# Altium PCB ICSP-PROG-PIN-1.5-2.54.PcbDoc
Units mm, origin at the board's own origin, x right, y up, seen from the top; angles counter-clockwise.
Board outline 20 x 34 mm, 2 copper layers (TOP, BOT), stack 0.325 mm thick; 3 components, 6 nets, 27 pads, 32 vias.
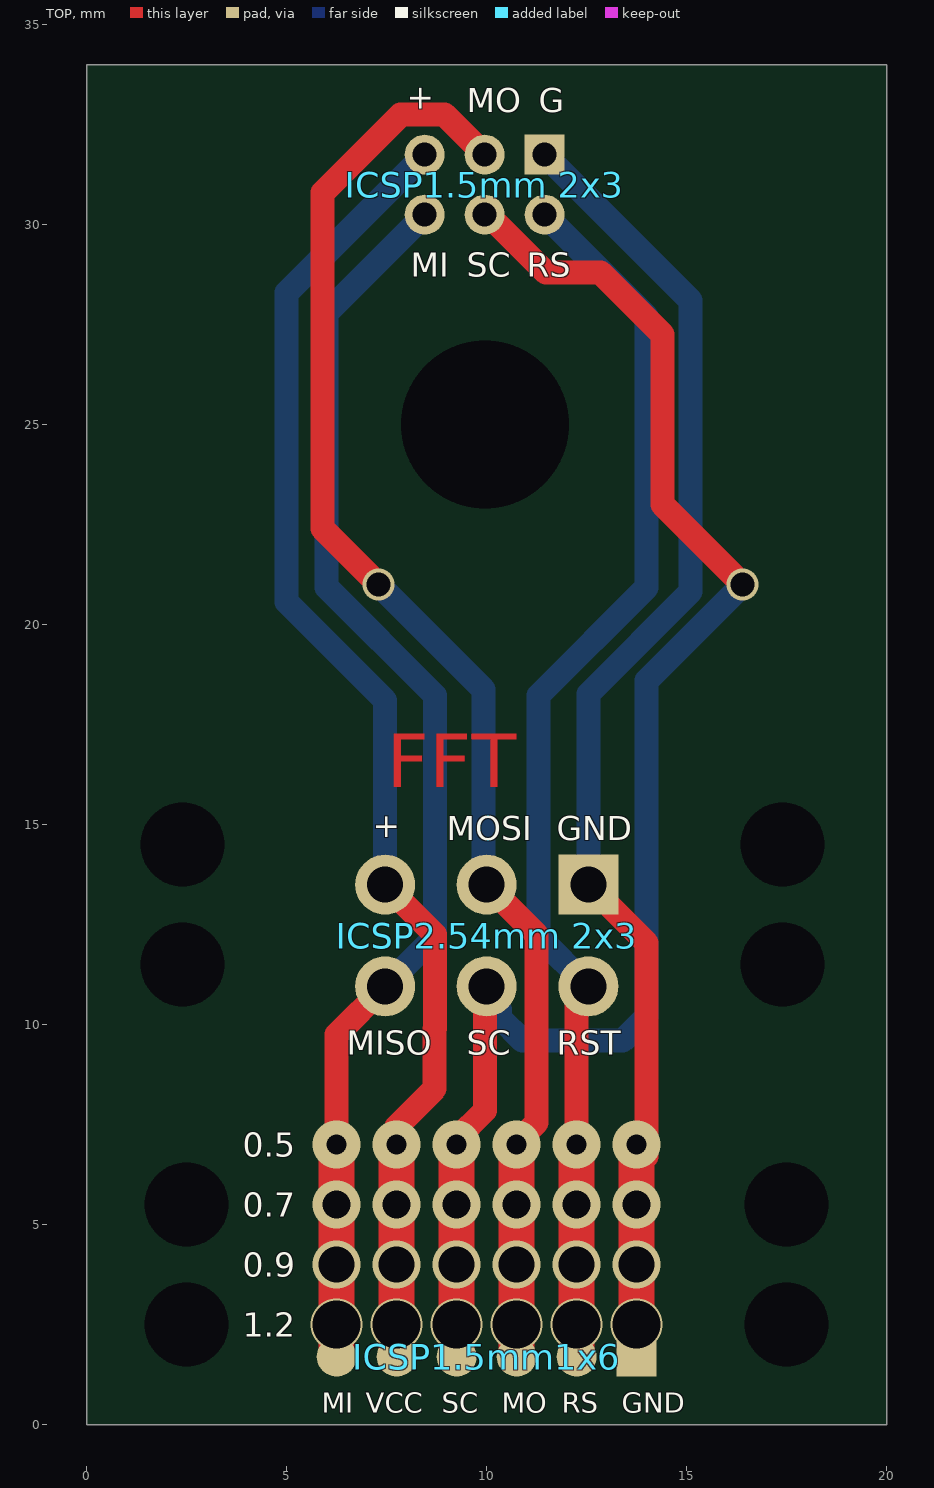
[diagram p0: TOP view]
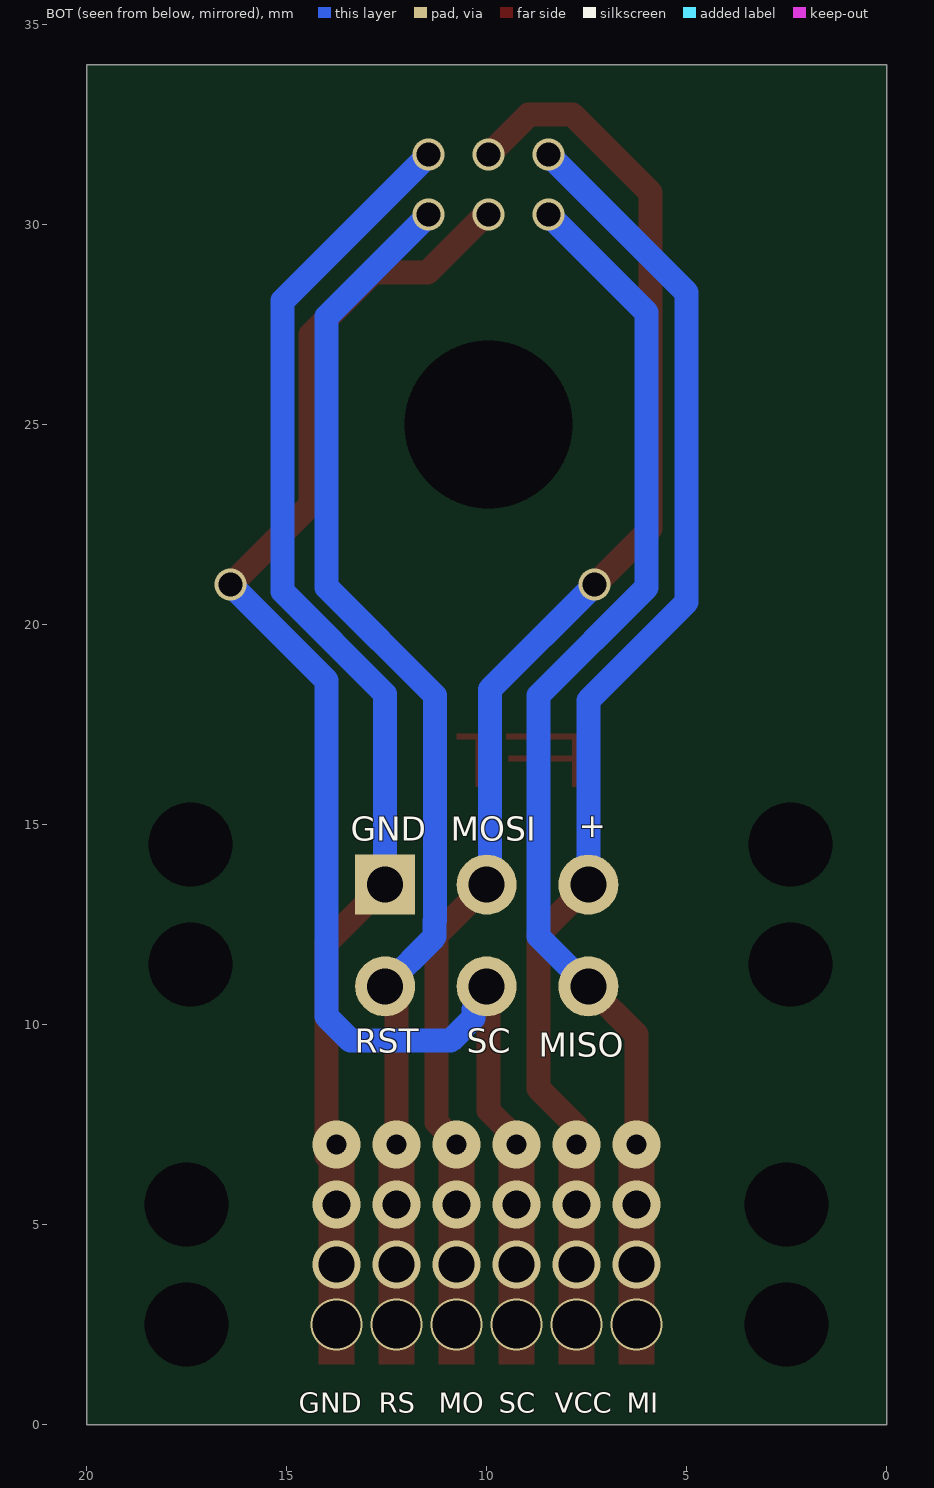
[diagram p1: BOT view, seen from below]

## Layer stack, top to bottom
Top Solder: solder mask 0.0102, Solder Resist, Dk 3.5
TOP: signal copper 0.0356
Dielectric 1: core 0.254, FR-4, Dk 4.2
BOT: signal copper 0.0356
Solder Side: solder mask 0.0102, Solder Resist, Dk 3.5

## Board outline
0,0 0,34 20,34 20,0

## Design rules (kind name [scope] priority, off if disabled: settings)
Clearance Clearance_GND_GND [InNet('GND') vs InNet('GND')] p1: gap=0 ignorepadtopadclearanceinfootprint=FALSE
Clearance [All] p2: gap=0.2 ignorepadtopadclearanceinfootprint=FALSE except(0: Arc-Region Arc-Hole Track-Region Track-Hole SMDPad-Region SMDPad-Hole THPad-Region THPad-Hole Via-Region Via-Hole Fill-Region Fill-Hole Poly-Region Poly-Hole Region-Region Region-Hole Text-Hole)
ComponentClearance [All] p1: gap=0.01 collisioncheckmode=3 verticalgap=0.254 showdistances=FALSE
HoleSize [All] p1: absolutevalues=TRUE maxlimit=10 minlimit=0.025 maxpercent=80.000 minpercent=20.000
MinimumSolderMaskSliver [All] p1 off: minsoldermaskwidth=0.1
PlaneClearance [All] p1: clearance=0
PolygonConnect PolygonConnect_via [isvia] p1: connectstyle=Direct reliefconductorwidth=0.254 reliefentries=4 polygonreliefangle="45 Angle" airgapwidth=0.15
PolygonConnect [All] p2: connectstyle=Relief reliefconductorwidth=0.254 reliefentries=4 polygonreliefangle="90 Angle" airgapwidth=0.1
RoomDefinition ICSP-PROG-PIN-1.5-2.54 [InComponentClass('ICSP-PROG-PIN-1.5-2.54')] p1: confinementstyle=ConfineOut formatcopy=TRUE lockcomponents=FALSE outline -287.018,-175.424 -236.218,-175.424 -236.218,-150.024 -287.018,-150.024
RoutingVias [All] p1: holewidth=0.6 width=0.9 viastyle="Through Hole" minholewidth=0.3 minwidth=0.5 maxholewidth=0.9 maxwidth=1.2
SilkToSilkClearance [All] p1 off: silktosilkclearance=0.1
SilkToSolderMaskClearance SilkscreenOverComponentPads [IsPad] p1 off: minsilkscreentomaskgap=0.1 clearancetoexposedcopper=TRUE
SolderMaskExpansion [All] p1: expansion=0.102 istentingtop=FALSE
Width [All] p1: maxlimit=10 minlimit=0.15 preferedwidth=0.3
24 further rules are at their usual default settings.

## Components (designator, comment, footprint, x,y, rotation, side; value= is the part's Value field where it differs from the comment)
ICSP1.5mm1x6 "ICSP pad" "ICSP prg PAD 1.5mm 1Line" 10,1.7 r0 top
"ICSP1.5mm 2x3" "ICSP pad" "ICSP prg PAD 1.5mm" 9.95,31 r90 top
"ICSP2.54mm 2x3" "ICSP pad" "ICSP prg PIN 2.54mm" 10,12.23 r90 top

## Footprints (in the part's own frame and the unit in brackets; to place one, negate y for a bottom-side part, rotate by r counter-clockwise, add the part's x,y. Pads: shape width x height; smd on the part's side, far side on the other; paste and mask are expansions set on the pad)
"ICSP prg PAD 1.5mm" [mm] "pads only"
  round 1 smd: 1(-0.75,1.5) 2(0.75,1.5) 3(-0.75,0) 4(0.75,0) 5(-0.75,-1.5)
  rect 1x1 smd: 6(0.75,-1.5)
"ICSP prg PAD 1.5mm 1Line" [mm] "pads only"
  round 1 smd: 1(-3.75,0) 2(-2.25,0) 3(-0.75,0) 4(0.75,0) 5(2.25,0)
  rect 1x1 smd: 6(3.75,0)
"ICSP prg PIN 2.54mm" [mm] "pads only"
  round 1.5 hole 0.9: 1(-1.27,2.54) 2(1.27,2.54) 3(-1.27,0) 4(1.27,0) 5(-1.27,-2.54)
  rect 1.5x1.5 hole 0.9: 6(1.27,-2.54)

## Part data
ICSP1.5mm1x6 "ICSP1.5mm 2x3" "ICSP2.54mm 2x3": library part "Progr ICSP", "PAD prog"

## Free pads (board coordinates)
  round 1.6 hole 2.1 unplated: 6(2.4,11.5) 6(2.4,14.5) 6(2.5,2.5) 6(2.5,5.5) 6(17.4,11.5) 6(17.4,14.5) 6(17.5,2.5) 6(17.5,5.5)
  round 1.6 hole 4.2 unplated: 6(9.96,25)

## Via types
v1: diameter 0.8, hole 0.6, TOP to BOT, tented both sides, 8 vias
v2: diameter 1.2, hole 0.9, TOP to BOT, 6 vias
v3: diameter 1.2, hole 0.7, TOP to BOT, 6 vias
v4: diameter 1.2, hole 0.5, TOP to BOT, 6 vias
v5: diameter 1.3, hole 1.2, TOP to BOT, 6 vias

## Nets (pads, with @x,y where several pads share a name; then routed paths per layer and width w, separated by ;. In a path a pad name is that pad's centre, name@x,y a point inside that pad or via, vN(x,y) a via of type N, cw(c..) or ccw(c..) an arc to the next point about the centre after c; other vN are vias at no path point)
GND: "ICSP1.5mm 2x3.6" "ICSP2.54mm 2x3.6" ICSP1.5mm1x6.6 | length 28.3
  TOP w0.6: 12.54,13.5 14,12.04 v4@14,6.7 ; v4(13.75,7) v4@13.79,7.04
  BOT w0.6: v1(11.45,31.75) 15.1,28.1 15.1,20.831 12.54,18.271 12.54,13.5
  other v2: 13.75,4
  other v3: 13.75,5.5
  other v5: 13.75,2.5
MOSI: "ICSP1.5mm 2x3.4" "ICSP2.54mm 2x3.4" ICSP1.5mm1x6.4 | length 34
  TOP w0.6: v1(7.3,21) 5.9,22.4 5.9,30.8 7.85,32.75 8.95,32.75 v1(9.95,31.75) ; 10,13.5 11.25,12.25 11.25,7.556 10.75,7.056 v4(10.75,7) v3(10.75,5.5) v2@10.75,4.5
  BOT w0.6: v1(7.3,21) 9.913,18.387 9.913,13.587 10,13.5
  other v2: 10.75,4
  other v5: 10.75,2.5
MSIO: "ICSP1.5mm 2x3.1" "ICSP2.54mm 2x3.1" ICSP1.5mm1x6.1 | length 29.9
  TOP w0.6: v2@6.25,4.5 v2(6.25,4) 6.25,4.7 v3(6.25,5.5) 6.25,9.75 7.46,10.96
  BOT w0.6: 7.46,10.96 8.71,12.21 8.71,18.227 6,20.937 6,27.8 v1(8.45,30.25)
  other v4: 6.25,7
  other v5: 6.25,2.5
RESET: "ICSP1.5mm 2x3.5" "ICSP2.54mm 2x3.5" ICSP1.5mm1x6.5 | length 28.6
  TOP w0.6: v2@12.25,4.5 12.25,10.67 12.54,10.96
  BOT w0.6: v1(11.45,30.25) 14,27.7 14,20.937 11.29,18.227 11.29,12.6 11.3,12.59 11.3,12.2 12.54,10.96
  other v2: 12.25,4
  other v3: 12.25,5.5
  other v4: 12.25,7
  other v5: 12.25,2.5
SCK: "ICSP1.5mm 2x3.3" "ICSP2.54mm 2x3.3" ICSP1.5mm1x6.3 | length 36.6
  TOP w0.6: v2@9.25,4.5 9.25,7.15 9.96,7.86 9.96,10.96 ; 9.828,11.132 10,10.96 ; v1(9.95,30.25) 10.036,30.25 11.486,28.8 12.85,28.8 14.4,27.25 14.4,23 v1(16.4,21)
  BOT w0.6: 10,10.96 10,10.716 10.337,10.38 10.337,10.163 10.9,9.6 13.4,9.6 14,10.2 14,18.6 v1(16.4,21)
  other v2: 9.25,4
  other v3: 9.25,5.5
  other v4: 9.25,7
  other v5: 9.25,2.5
VIN: "ICSP1.5mm 2x3.2" "ICSP2.54mm 2x3.2" ICSP1.5mm1x6.2 | length 31.1
  TOP w0.6: 7.46,13.5 8.71,12.25 8.71,9.9 8.7,9.89 8.7,8.4 7.75,7.45 v4(7.75,7) v3(7.75,5.5) v2(7.75,4)
  BOT w0.6: 7.46,13.5 7.46,18.111 5,20.571 5,28.3 v1(8.45,31.75)
  other v5: 7.75,2.5

## Other copper
TOP:
  rectangle net MSIO: 5.8,1.5 6.7,7.056
  rectangle net VIN: 7.3,1.5 8.2,7.056
  rectangle net SCK: 8.8,1.5 9.7,7.056
  rectangle net MOSI: 10.3,1.5 11.2,7.056
  rectangle net RESET: 11.8,1.5 12.7,7.056
  rectangle net GND: 13.3,1.5 14.2,7.056
  text "FFT" at 7.5,15.5 h2.3

## Silkscreen, mask and mechanical layers (free items; w line width, h text height)
Top Overlay:
  text "+" at 8.6,32.807 h0.6 r90
  text "MO" at 9.5,32.807 h0.6
  text "G" at 11.3,32.807 h0.6
  text "MI" at 8.1,28.7 h0.6
  text "SC" at 9.5,28.7 h0.6
  text "RS" at 11,28.7 h0.6
  text "MOSI" at 9,14.607 h0.6
  text "GND" at 11.75,14.607 h0.6
  text "+" at 7.75,14.6 h0.6 r90
  text "MISO" at 6.5,9.25 h0.6
  text "SC" at 9.5,9.25 h0.6
  text "RST" at 11.75,9.25 h0.6
  text "0.5" at 3.9,6.7 h0.6
  text "0.7" at 3.9,5.2 h0.6
  text "0.9" at 3.9,3.7 h0.6
  text "1.2" at 3.9,2.2 h0.6
  text "MI" at 5.88,0.3 h0.5
  text "VCC" at 6.98,0.3 h0.5
  text "SC" at 8.88,0.3 h0.5
  text "MO" at 10.38,0.3 h0.5
  text "RS" at 11.88,0.3 h0.5
  text "GND" at 13.38,0.3 h0.5
Bottom Overlay:
  text "+" at 7.1,14.6 h0.6 r270
  text "MOSI" at 10.9,14.6 h0.6
  text "GND" at 13.4,14.6 h0.6
  text "SC" at 10.5,9.3 h0.6
  text "RST" at 13.3,9.3 h0.6
  text "MISO" at 8.7,9.2 h0.6
  text "MI" at 6.5,0.3 h0.5
  text "VCC" at 8.3,0.3 h0.5
  text "SC" at 9.7,0.3 h0.5
  text "MO" at 11.2,0.3 h0.5
  text "RS" at 12.7,0.3 h0.5
  text "GND" at 14.7,0.3 h0.5
Top Solder:
  text "REV-A" at 0.8,32.8 h0.7
  text "2025-05" at 0.8,31.7 h0.7
  text "FFT" at 7.5,15.5 h2.3
M2:
  the board outline again, w0.1

## Dimensions
2.5,5.5 to 2.4,14.5 on M16
0,34 to 20,34 on M16
20,34 to 20,0 on M16
2.5,2.5 to 2.4,14.5 on M16
2.5,2.5 to 17.5,2.5 on M16

## Text inside footprints (layer, text, board x,y; h text height)
ICSP1.5mm1x6: M16 "MIS" at 5.8,1.5 h0.3; M16 "VIN" at 7.3,1.5 h0.3; M16 "SCK" at 8.8,1.5 h0.3; M16 "MOS" at 10.3,1.5 h0.3; M16 "RST" at 11.8,1.5 h0.3; M16 "GND" at 13.3,1.5 h0.3
"ICSP2.54mm 2x3": M16 "RST" at 11.7,11.73 h0.6; M16 "SCK" at 10.8,12.33 h0.6 r180; M16 "MOS" at 10.9,13.03 h0.6 r180; M16 "MIS" at 8.2,12.23 h0.6 r180